# Altium PCB LEDOption2.PcbDoc
Units mil, origin at the board's own origin, x right, y up, seen from the top; angles counter-clockwise.
Board outline 300 x 875 mil, 2 copper layers (Top Layer, Bottom Layer); 2 components, 2 nets, 9 pads, 0 vias.
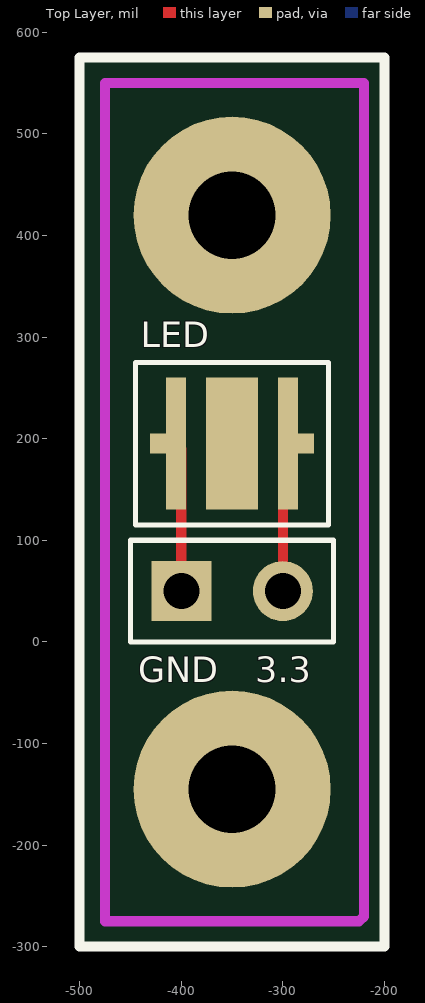
[diagram p0: Top Layer view]
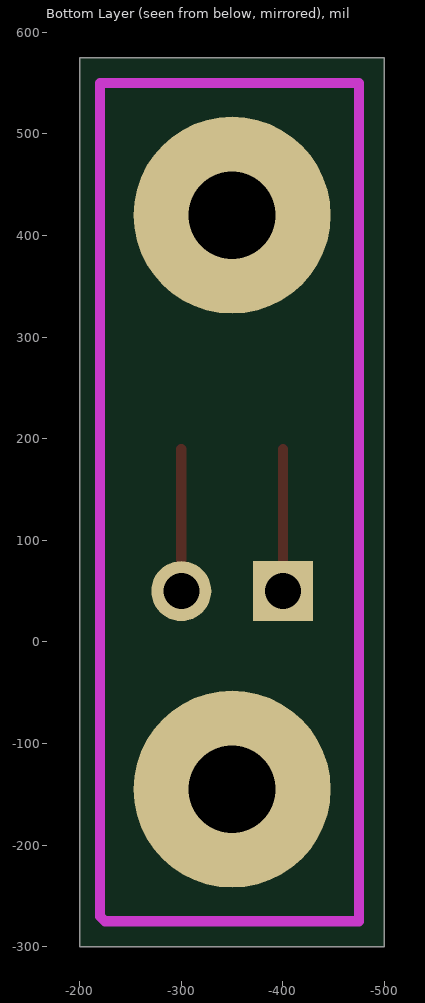
[diagram p1: Bottom Layer view, seen from below]

## Layer stack, top to bottom
Top Layer: signal copper 1.4
Dielectric: dielectric 12.6, FR-4, Dk 4.8
Bottom Layer: signal copper 1.4

## Board outline
-500,-300 -200,-300 -200,575 -500,575

## Design rules (kind name [scope] priority, off if disabled: settings)
Clearance [All] p1: gap=10
PolygonConnect [All] p1: connectstyle=Relief reliefconductorwidth=10 reliefentries=4 polygonreliefangle="90 Angle"
RoomDefinition LED [InComponentClass('LED')] p1: confinementstyle=ConfineIn formatcopy=TRUE lockcomponents=FALSE outline -550,-370 -150,-370 -150,625 -550,625
RoutingVias [All] p1: holewidth=28 width=50 viastyle="Through Hole" minholewidth=28 minwidth=50 maxholewidth=28 maxwidth=50
SilkscreenOverComponentPads SilkToSolderMaskClearance [IsPad] p1: minsilkscreentomaskgap=10
SolderMaskExpansion [All] p1: expansion=4
Width [All] p1: maxlimit=10 minlimit=10 preferedwidth=10
27 further rules are at their usual default settings.

## Classes and differential pairs
component class LED: LED

## Components (designator, comment, footprint, x,y, rotation, side; value= is the part's Value field where it differs from the comment)
LED "LED" LED -350,195 r270 top (schematic designator P10)
P9 "Header" HDR1X2 -400,50 r0 top

## Footprints (in the part's own frame and the unit in brackets; to place one, negate y for a bottom-side part, rotate by r counter-clockwise, add the part's x,y. Pads: shape width x height; smd on the part's side, far side on the other; paste and mask are expansions set on the pad)
HDR1X2 [mm] "Connector; Header; 2 Position"
  rect 1.5x1.5 hole 0.9: 1(0,0)
  round 1.5 hole 0.9: 2(2.54,0)
  silkscreen extent -1.27,-1.27 3.81,1.27
LED [mm]
  rect 0.5x0.4 smd: 1(0,1.85) 2(0,-1.85)
  rect 3.3x0.5 smd: 1(0,1.4) 2(0,-1.4)
  rect 3.3x1.3 smd: ""(0,0)
  silkscreen extent -2.03,-2.41 2.03,2.41

## Part data
LED: library part Component_1
P9: library part "Header 2", "Header, 2-Pin"

## Free pads (board coordinates)
  round 194 hole 86 unplated: 0(-350,-145) 0(-350,420)

## Nets (pads, with @x,y where several pads share a name; then routed paths per layer and width w, separated by ;. In a path a pad name is that pad's centre, name@x,y a point inside that pad or via, vN(x,y) a via of type N, cw(c..) or ccw(c..) an arc to the next point about the centre after c; other vN are vias at no path point)
GND: LED.1 P9.2 | length 139.9
  Top Layer w10: P9.2 LED.1@-300,189.88
VDD3.3: LED.2 P9.1 | length 139.9
  Top Layer w10: P9.1 LED.2@-400,189.88
pads on no net: LED.

## Keep-outs
Keep-Out Layer:
  lines w10: -475,-275 -225,-275 -220,-270 -220,-100 -220,300 -220,550 -475,550 -475,343.75 -475,-68.75 -475,-275

## Silkscreen, mask and mechanical layers (free items; w line width, h text height)
Top Overlay:
  the board outline again, w10
  text "GND" at -442.17,-40 h25
  text "3.3" at -327.17,-40 h25